# Altium PCB PCB_AtomExtension.PcbDoc
Units mil, origin at the board's own origin, x right, y up, seen from the top; angles counter-clockwise.
Board outline 1889.76 x 944.88 mil, 2 copper layers (Top Layer, Bottom Layer); 6 components, 8 nets, 35 pads, 0 vias.
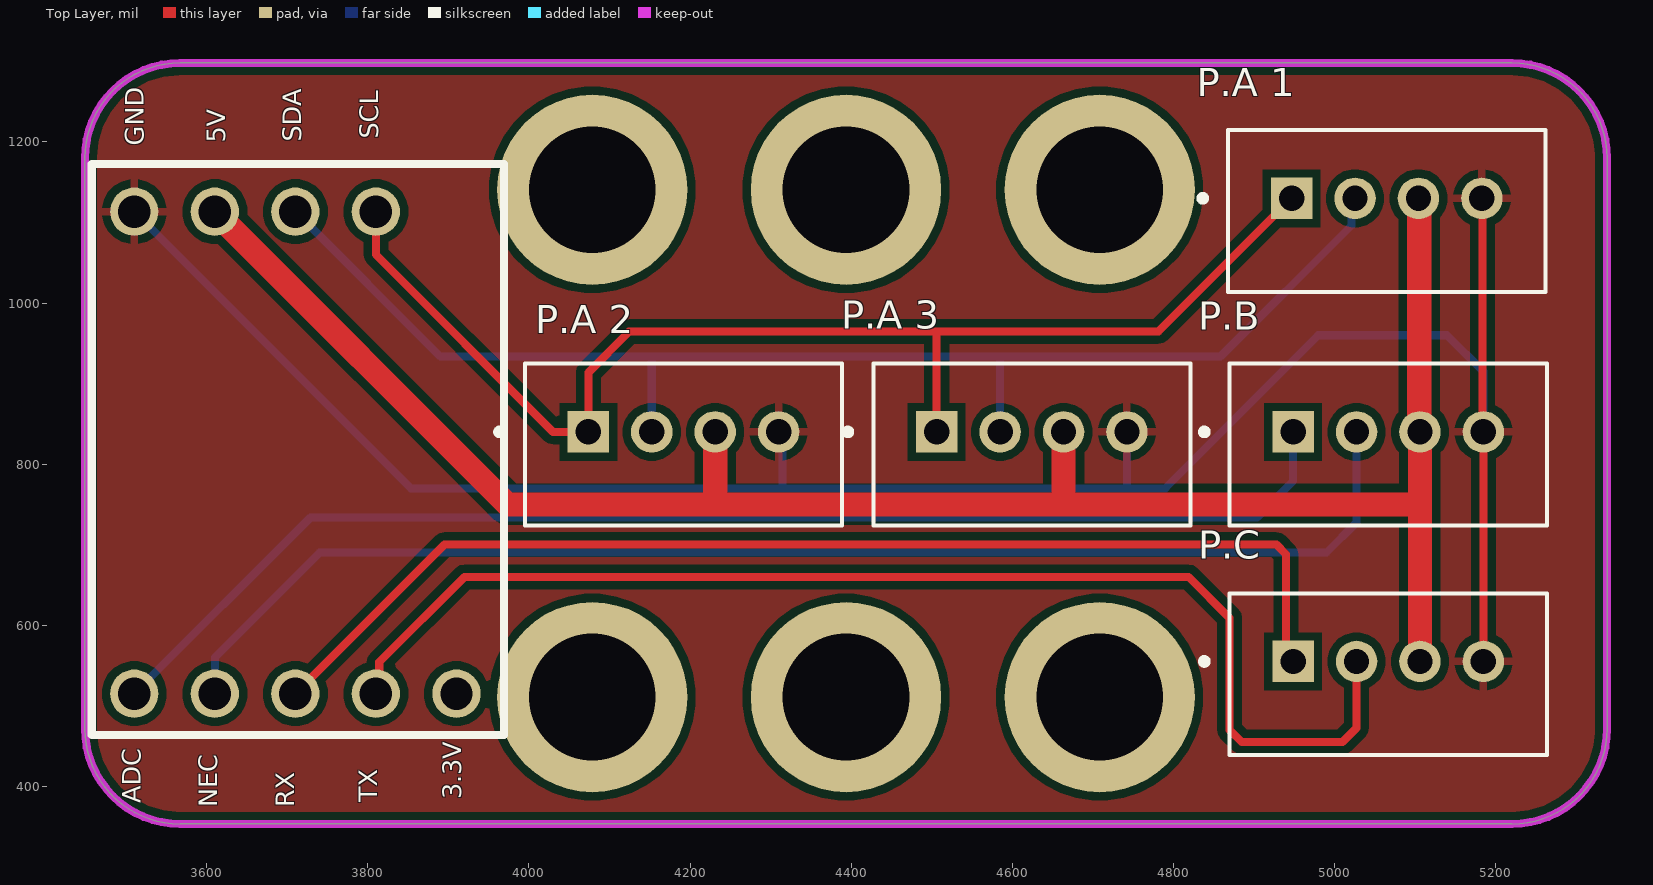
[diagram p0: Top Layer view]
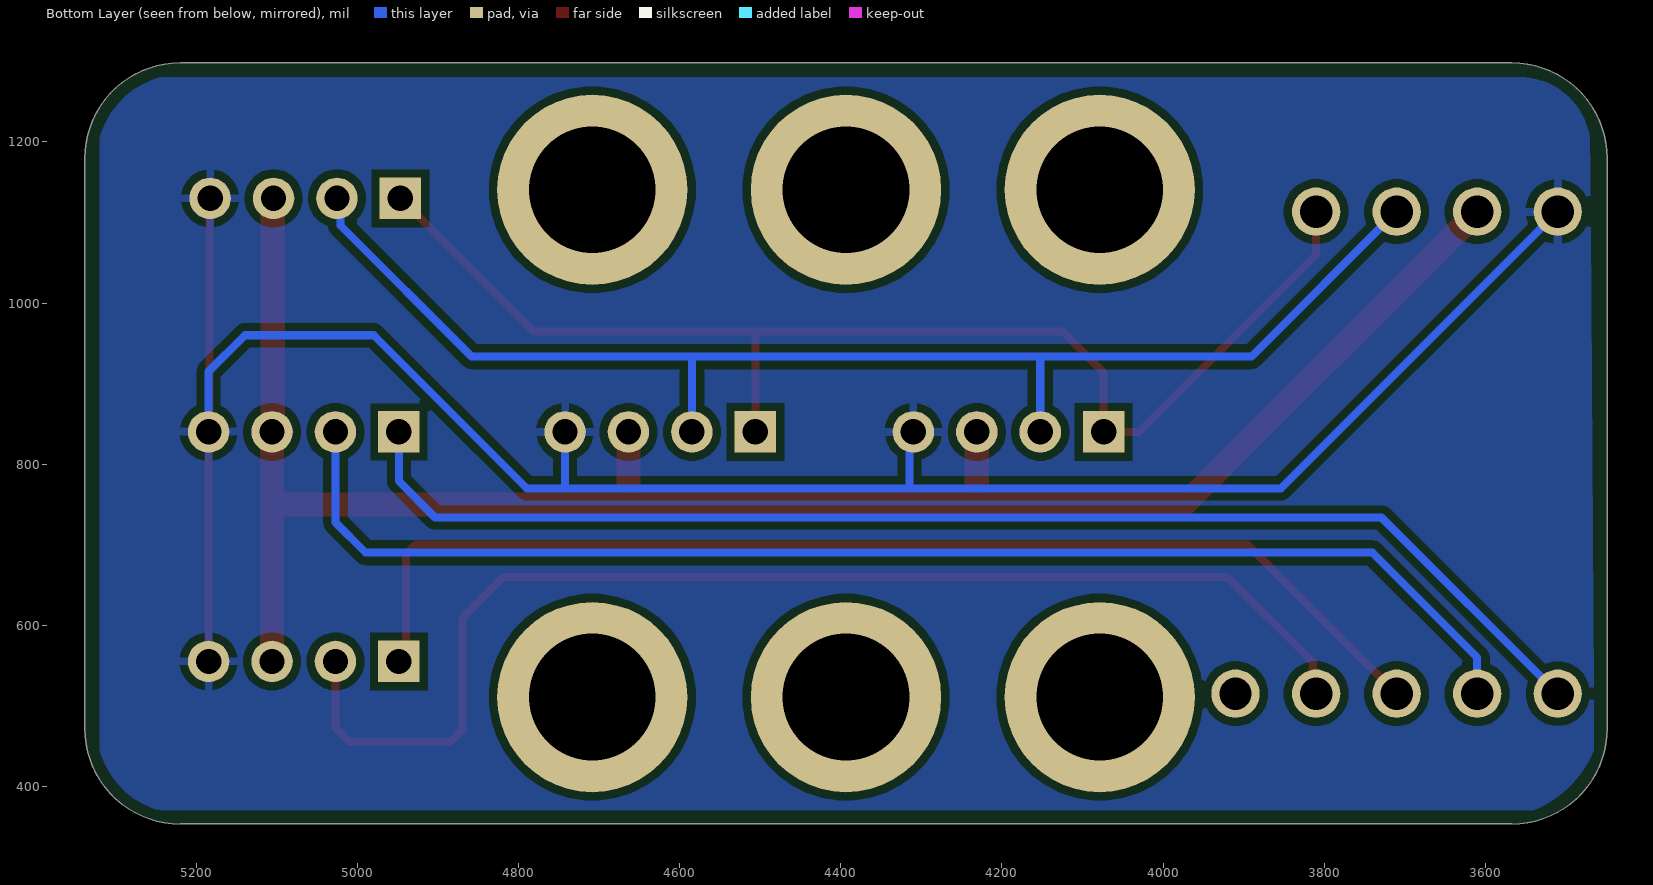
[diagram p1: Bottom Layer view, seen from below]
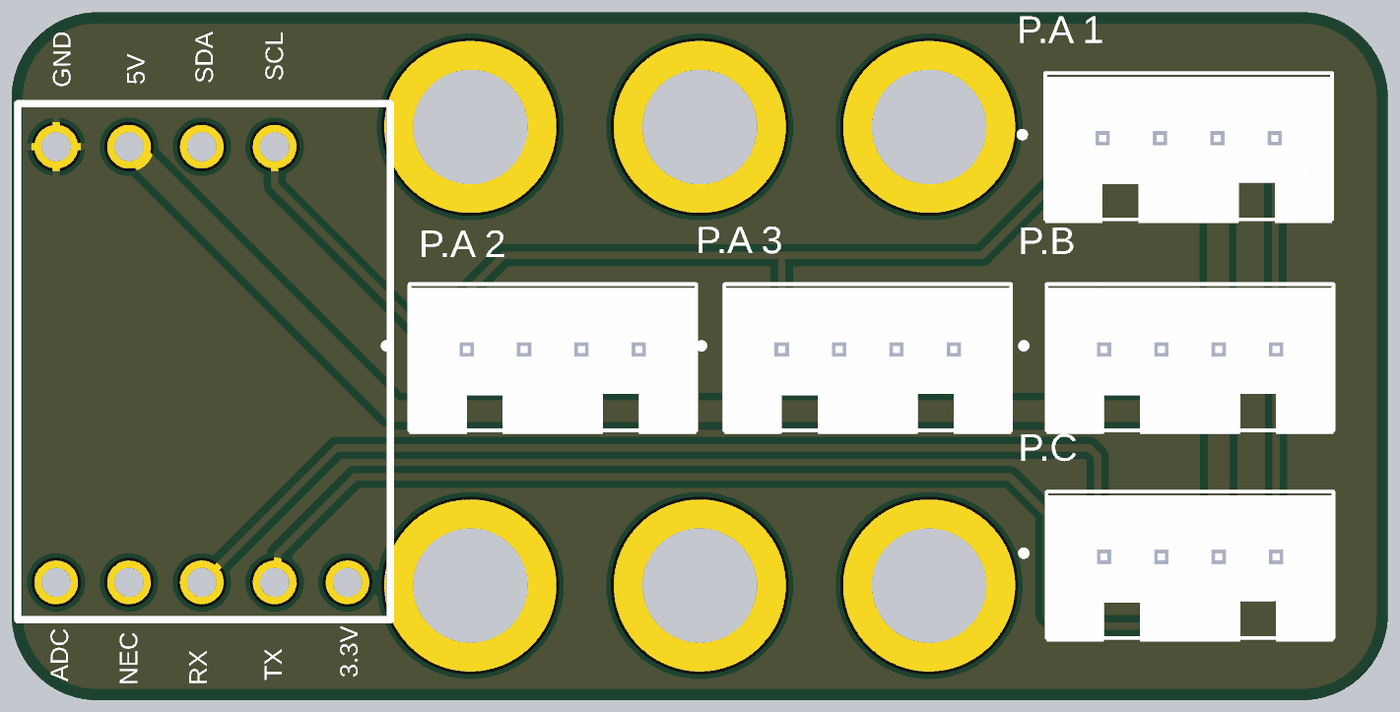
[diagram p2: 3D render of the assembled board from above, using the file's embedded part models]

## Layer stack, top to bottom
Top Solder: solder mask 0.4, Solder Resist, Dk 3.5
Top Layer: signal copper 1.4
Dielectric 1: dielectric 12.6, FR-4, Dk 4.8
Bottom Layer: signal copper 1.4
Bottom Solder: solder mask 0.4, Solder Resist, Dk 3.5

## Board outline
3448.78,471.3 3448.78,1179.96 cw(c3566.89,1179.96) 3566.89,1298.07 5220.43,1298.07 cw(c5220.43,1179.96) 5338.54,1179.96 5338.54,471.3 cw(c5220.43,471.3) 5220.43,353.19 3566.89,353.19 cw(c3566.89,471.3)

## Design rules (kind name [scope] priority, off if disabled: settings)
Clearance [All] p1: gap=10 ignorepadtopadclearanceinfootprint=FALSE except(0: Arc-Hole Track-Hole SMDPad-Hole THPad-Hole Via-Hole Fill-Hole Poly-Hole Region-Hole Text-Hole)
PolygonConnect [All] p1: connectstyle=Relief reliefconductorwidth=10 reliefentries=4 polygonreliefangle="90 Angle" airgapwidth=10
RoutingVias [All] p1: holewidth=28 width=50 viastyle="Through Hole" minholewidth=28 minwidth=50 maxholewidth=28 maxwidth=50
SolderMaskExpansion [All] p1: expansion=4 istentingtop=FALSE
Width [All] p1: maxlimit=31.5 minlimit=10 preferedwidth=10 minimp=50.000000 maximp=50.000000 favimp=50.000000
30 further rules are at their usual default settings.

## Components (designator, comment, footprint, x,y, rotation, side; value= is the part's Value field where it differs from the comment)
"P.A 1" "I2C" SEEED_110990030 5065,1130 r0 top
"P.A 2" "I2C" SEEED_110990030 4191.89,840 r0 top
"P.A 3" "I2C" SEEED_110990030 4624.37,840 r0 top
P.B "GPIO" SEEED_110990030 5066.89,840 r0 top
P.C "UART" SEEED_110990030 5066.89,555 r0 top
U1 "AtomIC" SPGA48x11 3713.15,1467.76 r270 top

## Footprints (in the part's own frame and the unit in brackets; to place one, negate y for a bottom-side part, rotate by r counter-clockwise, add the part's x,y. Pads: shape width x height; smd on the part's side, far side on the other; paste and mask are expansions set on the pad)
SEEED_110990030 [mm]
  rect 1.308x1.308 hole 0.8: 1(-3,0)
  round 1.308 hole 0.8: 2(-1,0) 3(1,0) 4(3,0)
  silkscreen extent -5.9,-2.95 5,2.15, body extent -5,-3.08 5,2.02, height 8.1
SPGA48x11 [mm]
  round 1.524 hole 1.02: 1(9,2.46) 2(9,-0.08) 3(9,-2.62) 4(9,-5.16) 5(24.2,5) 6(24.2,2.46) 7(24.2,-0.08) 8(24.2,-2.62) 9(24.2,-5.16)
  silkscreen extent 7.5,-6.5 25.5,6.5

## Part data
"P.A 1" "P.A 2" "P.A 3" P.B P.C: library part 110990030, "GROVE 2MM 4PIN VERT CONN 10PCS", PACKAGE=None, Arrow_Electronics-Purchase-URL=https://snapeda.com/shop?store=Arrow+Electronics&id=583576, Availability=Good, MF="Seeed Technology", Mouser-Purchase-URL=https://snapeda.com/shop?store=Mouser&id=583576, MP=110990030, Price=None, SnapEDA_Link=https://www.snapeda.com/parts/110990030/Seeed%20Technology%20Co.,%20Ltd/view-part/583576/?ref=snap

## Free pads (board coordinates)
  round 236.22 hole 157.48: 2(4078.7,510.67) 2(4078.7,1140.59) 2(4393.66,510.67) 2(4393.66,1140.59) 2(4708.62,510.67) 2(4708.62,1140.59)

## Nets (pads, with @x,y where several pads share a name; then routed paths per layer and width w, separated by ;. In a path a pad name is that pad's centre, name@x,y a point inside that pad or via, vN(x,y) a via of type N, cw(c..) or ccw(c..) an arc to the next point about the centre after c; other vN are vias at no path point)
G19/RX: P.C.1 U1.7 | length 1448.3
  Top Layer w10: U1.7 3895,700 4928.08,700 4940,688.08 4940,563.78 P.C.1
G21/SCL: "P.A 1.1" "P.A 2.1" "P.A 3.1" U1.1 | length 1569.3
  Top Layer w10: U1.1 3810,1060 4030,840 4073.78,840 4073.78,913.78 4124.52,964.52 4506.26,964.52 ; 4506.26,840 4506.26,964.52 ; 4946.89,1130 4781.41,964.52 4506.26,964.52
G22/TX: P.C.2 U1.6 | length 1554.2
  Top Layer w10: U1.6 3814.14,519.14 3814.14,554.14 3920,660 4819.14,660 4870,609.14 4870,470 4885,455 5010,455 5027.52,472.52 P.C.2
G23/NEC: P.B.2 U1.8 | length 1644.4
  Bottom Layer w10: U1.8 3610,560 3740,690 4990,690 5027.52,727.52 P.B.2
G25/SDA: "P.A 1.2" "P.A 2.2" "P.A 3.2" U1.2 | length 1673.6
  Bottom Layer w10: U1.2 3890.05,933.38 4152.52,933.38 ; 4152.52,840 4152.52,933.38 ; 4585,840 4585,932.38 ; 4858.38,933.38 4585,933.38 4152.52,933.38 ; 4859.08,934.08 5021.5,1096.5 5021.5,1125.87 5025.63,1130
G33/ADC: P.B.1 U1.9 | length 1609.3
  Bottom Layer w10: U1.9 3728.78,733.78 4903.78,733.78 4948.78,778.78 P.B.1
Gnd: "P.A 1.4" "P.A 2.4" "P.A 3.4" P.B.4 P.C.4 U1.4 | length 2708.5
  Top Layer w10: 5183.11,1130 5184.06,1129.06 5184.06,840.94 P.B.4 P.C.4
  Bottom Layer w10: U1.4 3853.43,770 4315,770 ; 4310,840 4315,835 4315,770 ; 4742.48,840 4742.48,772.48 4740,770 ; P.B.4 5185,915 5140,960 4980,960 4790,770 4740,770 ; 4315,770 4740,770
Vcc: "P.A 1.3" "P.A 2.3" "P.A 3.3" P.B.3 P.C.3 U1.3 | length 2402.6
  Top Layer w30: U1.3 3973.43,750 4231.26,750 ; 4231.26,840 4231.26,750 ; 4663.74,840 4663.74,750 ; 5104.37,1130 5105.31,1129.06 5105.31,840.95 P.B.3 5106.26,750 ; P.C.3 5106.26,750 ; 4231.26,750 4663.74,750 ; 4663.74,750 5106.26,750
pads on no net: U1.5

## Polygon pours and split planes (outlines as drawn)
Gnd on Top Layer "GND_L01_P000" (solid, pour order 0): 3448.78,1208.92 3448.78,461.22 ccw(c3555,461.22) 3555,355 3555,350 5240,350 ccw(c5198.54,490.01) 5338.54,448.54 5338.54,1211.46 5250,1300 3518,1300
Gnd on Bottom Layer "GND_L02_P002" (solid, pour order 2): 3470,1215 3470,1185 cw(c3557.5,1192.5) 3550,1280 5245,1280 cw(c5217.5,1177.5) 5320,1205 5320,445 cw(c5217.5,472.5) 5245,370 3540,370 cw(c3592.5,497.5) 3465,445

## Keep-outs
Top Layer:
  the board outline again, w10

## Silkscreen, mask and mechanical layers (free items; w line width, h text height)
Top Overlay:
  text "SCL" at 3821.3,1203.77 h39.37 r90
  text "SDA" at 3725.17,1200.36 h39.37 r90
  text "5V" at 3631.3,1198.77 h39.37 r90
  text "GND" at 3529.56,1195 h39.37 r90
  text "3.3V" at 3923.87,384.05 h39.37 r90
  text "TX" at 3820,380 h39.37 r90
  text "ADC" at 3526.3,378.77 h39.37 r90
  text "NEC" at 3621.3,373.77 h39.37 r90
  text "RX" at 3716.73,373.77 h39.37 r90